# Altium PCB PCB_NewSim_2_2023-07-09.pcbdoc (part 3 of 3)
Units mil, origin at the board's own origin, x right, y up, seen from the top; angles counter-clockwise.
Board outline 6950 x 7613.07 mil, 2 copper layers (Top Layer, Bottom Layer); 120 components, 161 nets, 571 pads, 250 vias.
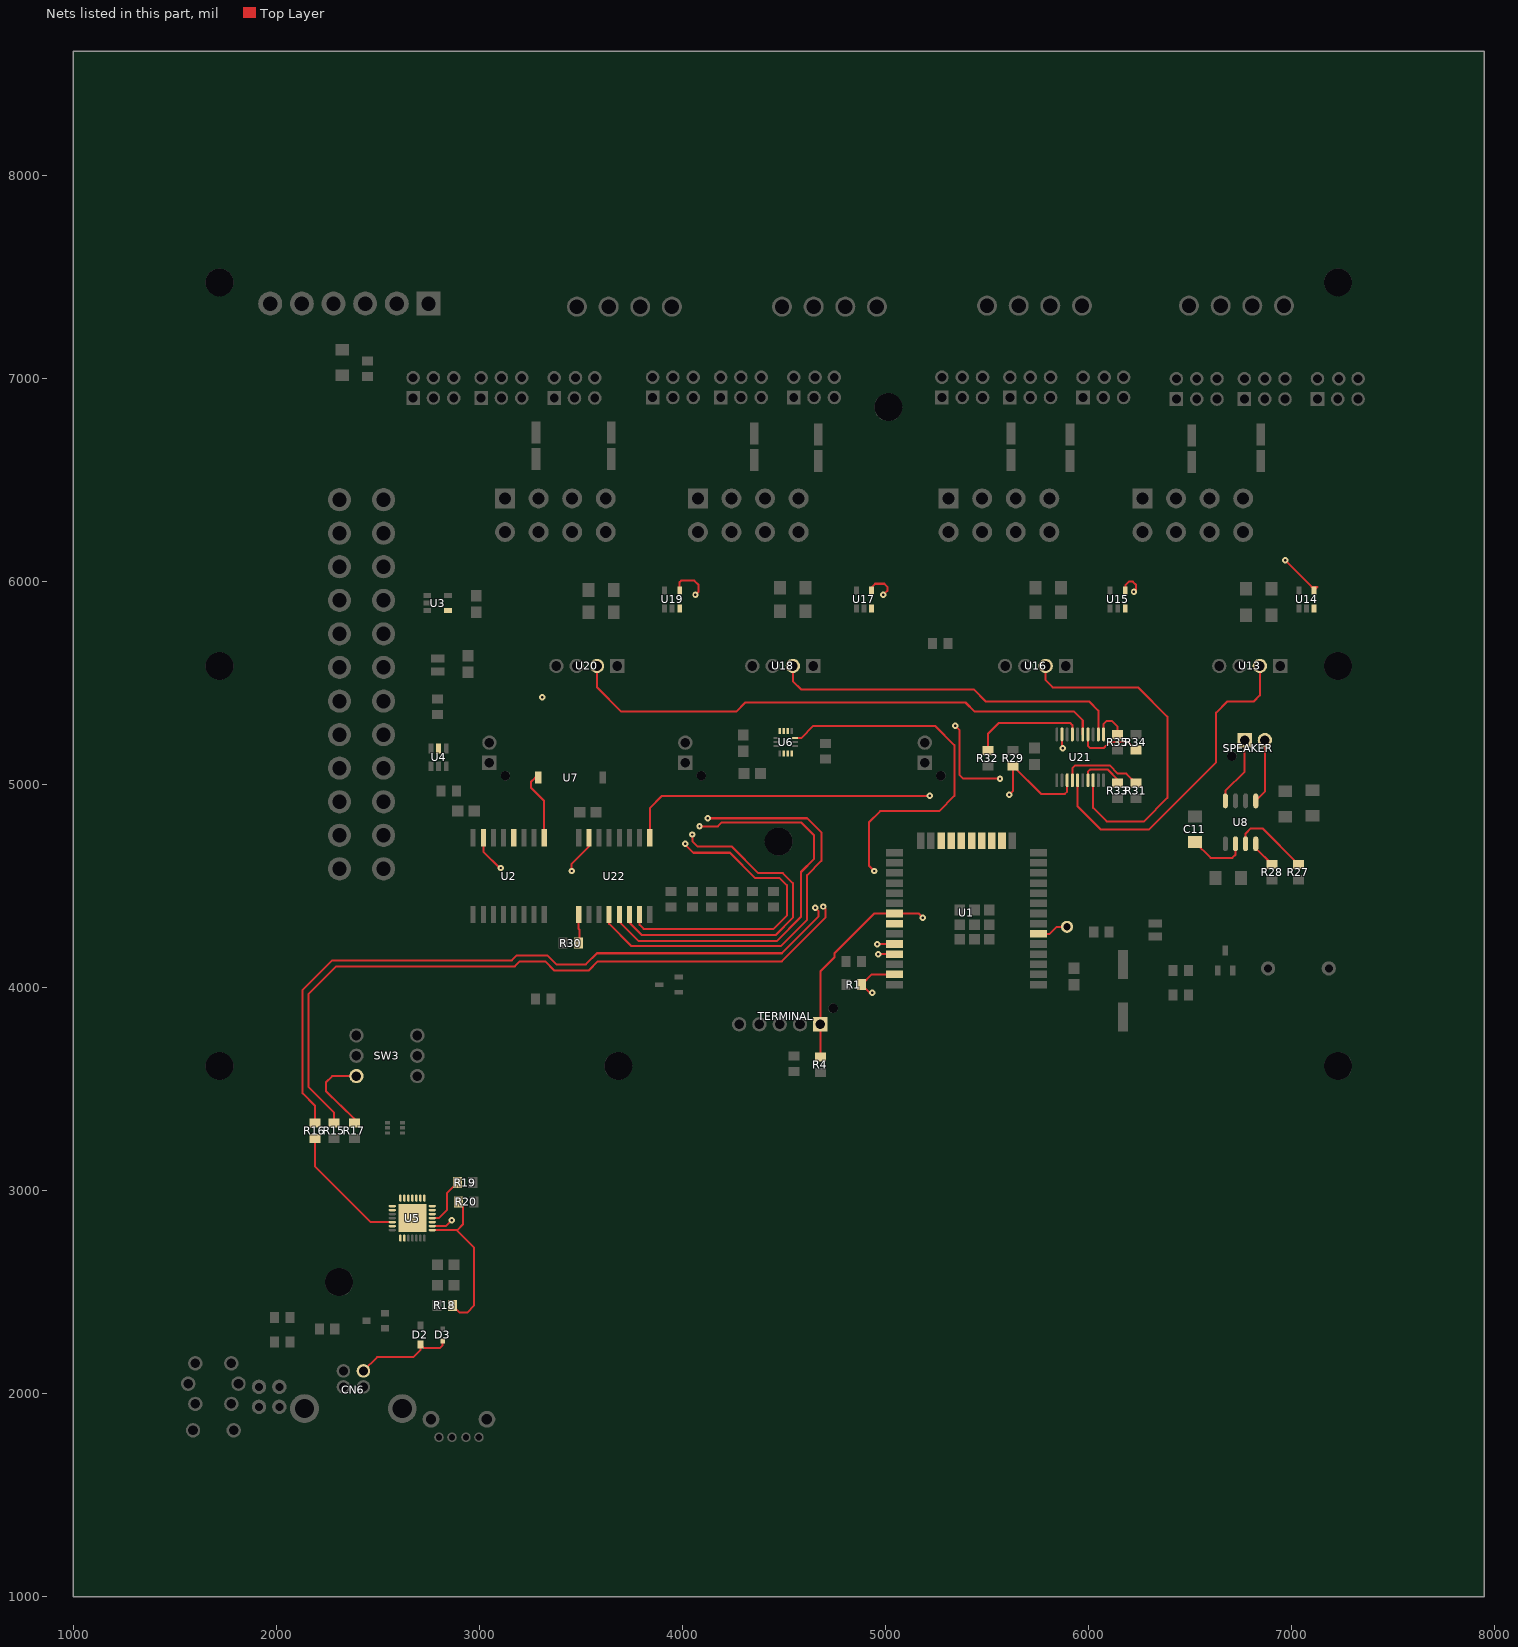
[diagram p3: the nets of this part, all layers, seen from the top]

## Via types
v1: diameter 31.5, hole 12, Top Layer to Bottom Layer, tented both sides, 239 vias
v2: diameter 39.37, hole 19.69, Top Layer to Bottom Layer, tented both sides, 10 vias
v3: diameter 24, hole 12, Top Layer to Bottom Layer, tented both sides, 1 vias

## Nets (pads, with @x,y where several pads share a name; then routed paths per layer and width w, separated by ;. In a path a pad name is that pad's centre, name@x,y a point inside that pad or via, vN(x,y) a via of type N, cw(c..) or ccw(c..) an arc to the next point about the centre after c; other vN are vias at no path point) (continued)
SDA_6DOF: R4.2 TERMINAL.1 U1.31 U6.14 | length 3536.2
  Top Layer w10: U6.14@4555.18,5229.61 4585.4,5229.62 4645.7,5289.93 4833,5289.93 5245,5289.93 5340,5194.93 5340,4944.93 5265,4869.93 4975,4869.93 4920,4814.93 4920,4599.93 v1(4945,4574.93) ; R4.2@4680,3662.97 TERMINAL.1@4680,3819.93 4680,4079.93 4750,4149.93 4750,4169.93 4945.6,4365.52 U1.31@5045.67,4365.49 5164.4,4365.52 v1(5185,4344.93)
  Mid-Layer 2 w10: v1(4945,4574.93) 4945,4599.93 4925,4619.93 4870,4619.93 4830,4579.93 4830,4519.93 5000,4349.93 5180,4349.93 v1(5185,4344.93)
SDA_ENC_RESET: R1.1 U1.37 U2.15 U21.19 U22.15 | length 6586.7
  Top Layer w10: U2.15@3020,4738.9 3020,4669.93 3100,4589.93 v1(3105,4589.93) ; v1(3455,4574.93) 3455,4609.93 3540,4694.93 U22.15@3540,4738.9 ; v1(4935,3974.93) 4923.04,3974.93 R1.1@4883.04,4014.93 4933.61,4065.49 U1.37@5045.67,4065.49 ; U21.19@5870.43,5247.96 5870.43,5184.49 v1(5875,5179.93)
  Mid-Layer 1 w10: v1(3310,5429.93) 3310,5259.93 3220,5169.93 3220,5024.93 3175,4979.93 3100,4979.93 3020,4899.93 3020,4674.93 v1(3105,4589.93) 3105,4594.93 3135,4624.93 3405,4624.93 v1(3455,4574.93) 4300,4574.93 4900,3974.93 v1(4935,3974.93)
  Mid-Layer 2 w10: v1(3310,5429.93) 3375,5494.93 5210,5494.93 5525,5179.93 v1(5875,5179.93)
SDA_PR_A: U16.2 U21.8 | length 1721.5
  Top Layer w10: U16.2@5790,5584.93 5790,5514.93 5825,5479.93 6245,5479.93 6390,5334.93 6390,4934.93 6275,4819.93 6090,4819.93 6024,4885.93 U21.8@6023.98,5021.89
SDA_PR_B: U18.2 U21.12 | length 1756.9
  Top Layer w10: U18.2@4545,5584.93 4545,5509.93 4585,5469.93 5435,5469.93 5495,5409.93 6005,5409.93 6049.6,5365.32 U21.12@6049.6,5247.93
SDA_PR_C: U20.2 U21.15 | length 2671.7
  Top Layer w10: U20.2@3580,5584.93 3580,5479.93 3700,5359.93 4265,5359.93 4310,5404.93 5395,5404.93 5440,5359.93 5930,5359.93 5972.8,5317.12 U21.15@5972.8,5247.93
SDA_YAW: U13.2 U21.5 | length 1635.6
  Top Layer w10: U21.5@5947.2,5021.89 5947.2,4892.73 6060,4779.93 6300,4779.93 6630,5109.93 6630,5354.93 6685,5409.93 6815,5409.93 6845,5439.93 U13.2@6845,5584.93
TXD: R16.2 U5.26 | length 632.3
  Top Layer w10: R16.2@2190,3256.88 2190,3119.93 2464.71,2845.22 U5.26@2571.57,2845.22
U0RXD: R16.1 U1.34 | length 3965.4
  Top Layer w10: R16.1@2190,3332.93 2190,3419.93 2130,3479.93 2130,3989.93 2275,4134.93 3160,4134.93 3185,4159.93 3335,4159.93 3380,4114.93 3525,4114.93 3580,4169.93 4490,4169.93 4670,4349.93 4670,4378.73 v1(4655.3,4393.43) ; v1(4960,4214.93) U1.34@5045.67,4215.49
  Mid-Layer 1 w10: v1(4655.3,4393.43) 4655.3,4319.62 4665,4309.93 4865,4309.93 v1(4960,4214.93)
U0TXD: R15.1 U1.35 | length 4052.1
  Top Layer w10: R15.1@2285,3332.93 2285,3384.93 2160,3509.93 2160,3969.93 2295,4104.93 2455,4104.93 3175,4104.93 3200,4129.93 3325,4129.93 3370,4084.93 3538.4,4084.93 3583.4,4129.93 4490,4129.93 4705,4344.93 4705,4389.93 v1(4695,4399.93) ; v1(4965,4164.93) U1.35@5045.67,4165.49
  Mid-Layer 1 w10: v1(4695,4399.93) 4695,4359.93 4720,4334.93 4915,4334.93 4995,4254.93 4995,4194.93 v1(4965,4164.93)
U1_6: pad.1 U1.6 | length 155.2
  Top Layer w10: U1.6@5754.33,4265.5 5810,4264.93 5845,4299.93 v1(5895,4299.93)
U1_16: U1.16
U1_17: U1.17
U1_18: U1.18
U1_19: U1.19
U1_20: U1.20
U1_21: U1.21
U1_22: U1.22
U1_32: U1.32
U2_12: U2.12
U3_4: U3.4
U4_5: U4.5
U5_1: U5.1
U5_2: U5.2
U5_8: R18.2 R20.2 U5.8 | length 946.3
  Top Layer w10: U5.8@2768.42,2805.82 2889.1,2805.82 2975,2719.93 2975,2434.93 2940,2399.93 2903,2399.93 R18.2@2868.04,2434.93 ; U5.8@2768.4,2805.93 2891,2805.93 2920,2834.93 2920,2921.93 R20.2@2896.96,2944.93
U5_10: U5.10
U5_11: R19.2 U5.11 | length 244.7
  Top Layer w10: U5.11@2768.42,2864.92 2800,2864.93 2840,2904.93 2840,2987.93 R19.2@2891.96,3039.93
U5_12: U5.12
U5_13: U5.13
U5_14: U5.14
U5_15: U5.15
U5_16: U5.16
U5_17: U5.17
U5_18: U5.18
U5_19: U5.19
U5_20: U5.20
U5_21: U5.21
U5_22: U5.22
U5_23: U5.23
U5_27: U5.27
U5_29: U5.29
U6_2: U6.2
U6_3: U6.3
U6_4: U6.4
U6_9: U6.9
U6_10: U6.10
U6_11: U6.11
U8_2: C11.1 U8.2 | length 292.6
  Top Layer w10: C11.1@6525,4717.23 6602.3,4639.93 6710,4639.93 6725,4654.93 U8.2@6725,4709.31
U8_3: R27.2 U8.3 | length 394.3
  Top Layer w10: U8.3@6775,4709.31 6775,4759.93 6800,4784.93 6858.04,4784.93 R27.2@7035,4607.97
U8_4: R28.2 U8.4 | length 134.5
  Top Layer w10: U8.4@6825,4709.31 6825,4687.97 R28.2@6905,4607.97
U8_5: SPEAKER.2 U8.5 | length 318
  Top Layer w10: U8.5@6825,4920.53 6870,4965.53 SPEAKER.2@6870,5219.93
U8_8: SPEAKER.1 U8.8 | length 338.8
  Top Layer w10: U8.8@6675,4920.53 6675,4969.93 6770,5064.93 SPEAKER.1@6770,5219.93
U14_3: U14.3
U14_4: U14.4 U22.4 | length 6327.5
  Top Layer w10: U22.4@3640,4360.95 3640,4314.93 3750,4204.93 4485,4204.93 4615,4334.93 4615,4554.93 4685,4624.93 4685,4764.93 4615,4834.93 v1(4125,4834.93) ; v1(6970,6104.93) 7100,5974.93 7130,5974.93 7112.4,5957.32 U14.4@7112.4,5955.73
  Mid-Layer 1 w10: v1(4125,4834.93) 4230,4939.93 5145,4939.93 5195,4989.93 6275,4989.93 6330,5044.93 6330,5719.93 6395,5784.93 6905,5784.93 6940,5819.93 6940,6079.82 6964.7,6104.93 v1(6970,6104.93)
U15_3: U15.3
U15_4: U15.4 U22.5 | length 5797.3
  Top Layer w10: U22.5@3690,4360.95 3690,4324.93 3785,4229.93 4465,4229.93 4585,4349.93 4585,4569.93 4650,4634.93 4650,4749.93 4585,4814.93 4195,4814.93 4175,4794.93 v1(4085,4794.93) ; v1(5345,5289.93) 5365,5269.93 5365,5049.93 5385,5029.93 v1(5565,5029.93) ; U15.4@6182.4,5955.73 6182.4,5982.32 6200,5999.93 6220,5999.93 6235,5984.93 6235,5959.93 v1(6225,5949.93)
  Mid-Layer 1 w10: v1(4085,4794.93) 4075,4804.93 4075,4874.93 4185,4984.93 5025,4984.93 5105,5064.93 5105,5239.93 5155,5289.93 v1(5345,5289.93) ; v1(5565,5029.93) 6145,5029.93 6225,5109.93 v1(6225,5949.93)
U17_3: U17.3
U17_4: U17.4 U22.6 | length 3836.8
  Top Layer w10: U22.6@3740,4360.95 3740,4319.93 3800,4259.93 4460,4259.93 4545,4344.93 4545,4514.93 4495,4564.93 4375,4564.93 4245,4694.93 4077.2,4694.93 4050,4722.13 v1(4050,4754.93) ; U17.4@4932.4,5955.73 4932.4,5972.32 4950,5989.93 4995,5989.93 5010,5974.93 5010,5954.93 v1(4990,5934.93)
  Mid-Layer 1 w10: v1(4050,4754.93) 4050,4894.93 4185,5029.93 4905,5029.93 4990,5114.93 v1(4990,5934.93)
U19_3: U19.3
U19_4: U19.4 U22.7 | length 3087.7
  Top Layer w10: U22.7@3790,4360.95 3790,4309.93 3810,4289.93 4450,4289.93 4515,4354.93 4515,4504.93 4480,4539.93 4360,4539.93 4235,4664.93 4055,4664.93 4015,4704.93 v1(4015,4709.93) ; U19.4@3987.4,5955.73 3987.4,5997.32 3995,6004.93 4060,6004.93 4080,5984.93 4080,5949.93 v1(4065,5934.93)
  Mid-Layer 1 w10: v1(4015,4709.93) 4015,4904.93 4175,5064.93 4175,5729.93 4065,5839.93 v1(4065,5934.93)
U21_3: R29.1 U21.3 U22.9 | length 2476.5
  Top Layer w10: U22.9@3840,4738.9 3840,4884.93 3900,4944.93 v1(5220,4944.93) ; v1(5610,4949.93) 5630,4969.93 R29.1@5630,5091.88 5766.96,4954.93 5885,4954.93 5896.02,4965.95 U21.3@5896.02,5021.89
  Mid-Layer 1 w10: v1(5220,4944.93) 5225,4949.93 v1(5610,4949.93)
U21_4: R31.2 U21.4 | length 414.6
  Top Layer w10: U21.4@5921.61,5021.89 5921.6,5081.52 5935,5094.93 6105,5094.93 6145,5054.93 6188.04,5054.93 R31.2@6235,5007.97
U21_7: R33.2 U21.7 | length 230.5
  Top Layer w10: U21.7@5998.39,5021.89 5998.4,5063.33 6010,5074.93 6095,5074.93 6145,5024.93 R33.2@6145,5007.97
U21_11: R35.1 U21.11 | length 177.5
  Top Layer w10: U21.11@6075.16,5247.96 6075.16,5300.09 6090,5314.93 6115,5314.93 6145,5284.93 R35.1@6145,5247.97
U21_14: R34.1 U21.14 | length 326
  Top Layer w10: U21.14@5998.39,5247.96 5998.39,5191.53 6010,5179.93 6075,5179.93 6105,5209.93 6196.96,5209.93 R34.1@6235,5171.88
U21_17: R32.1 U21.17 | length 571.5
  Top Layer w10: R32.1@5505,5167.97 5505,5249.93 5560,5304.93 5910,5304.93 5921.61,5293.32 U21.17@5921.61,5247.96
U22_1: R30.1 U22.1 | length 142.3
  Top Layer w10: U22.1@3490,4360.95 3490,4289.93 3493.04,4286.89 R30.1@3493.04,4219.93
USB_AUTORESET: R17.2 SW3.6 U5.9 | length 1458.8
  Top Layer w10: R17.2@2385,3332.93 2385,3354.93 2245,3489.93 2245,3534.93 2275,3564.93 SW3.6@2395,3564.93 ; U5.9@2768.42,2825.52 2835.59,2825.51 v1(2865,2854.93)
  Mid-Layer 1 w10: SW3.6@2395,3564.93 2435,3564.93 2480,3519.93 2485,3254.93 2865,2874.93 v1(2865,2854.93)
VBUS: CN6.1 D2.2 D3.2 | length 496.5
  Top Layer w10: CN6.1@2429.21,2112.64 2496.5,2179.93 2675,2179.93 2710,2214.93 D2.2@2710,2243.76 2728.84,2224.93 2805,2224.93 2820,2239.93 D3.2@2820,2260.4
VIBRATION: U2.9 U7.1 | length 347.8
  Top Layer w10: U7.1@3291.54,5034.93 3275,5034.93 3255,5014.93 3255,4984.93 3320,4919.93 U2.9@3320,4738.9
pads on no net: CN3. CN4. CN5. SPEAKER. TERMINAL.

## Polygon pours and split planes (outlines as drawn)
GND on Bottom Layer (solid): 1535,1789.92 2135,1789.92 2235,1689.92 2980,1689.92 3080,1789.92 3080,3639.93 3260,3819.93 3940,3819.93 4285,3474.93 4820,3474.93 5005,3659.93 5005,3979.93 5040,4014.93 5750,4014.93 5760,4014.93 6030,3744.93 6880,3744.93 6995,3859.93 7115,3979.93 7115,4334.93 7235,4454.93 7235,5339.93 7115,5459.93 7115,5764.93 7235,5884.93 7235,6009.93 7095,6149.93 3045,6149.93 2900,6294.93 2900,6409.93 2650,6659.93 2565,6659.93 2490,6734.93 2490,7034.93 2615,7159.93 2735,7159.93 2900,7324.93 2900,7519.93 2810,7609.93 1990,7609.93 1890,7509.93 1890,4274.93 1800,4184.93 1800,2554.93 1535,2289.93
GND1 on Bottom Layer (solid): 7070,6184.93 7070,6499.93 7400,6829.93 7400,7044.93 7280,7164.93 7220,7164.93 7125,7259.93 7125,7544.93 7005,7664.93 5130,7664.93 3280,7649.93 2820,7169.93 2800,7169.93 2745,7114.93 2670,7114.93 2560,7004.93 2560,6819.93 2695,6684.93 2700,6684.93 3015,6369.93 3015,6254.93 3085,6184.93
GND1 on Bottom Layer (solid): 3120,6199.93 6890,6199.93 6905,6214.93 6905,6104.93 3125,6104.93 3115,6094.93
GND on Mid-Layer 2 (solid): 1535,1784.92 2135,1784.92 2235,1684.92 2980,1684.92 3080,1784.92 3080,3634.93 3260,3814.93 3940,3814.93 4285,3469.93 4820,3469.93 5005,3654.93 5005,3974.93 5040,4009.93 5750,4009.93 5760,4009.93 5925,3844.93 6995,3844.93 6995,3854.93 7115,3974.93 7115,4329.93 7235,4449.93 7235,5334.93 7115,5454.93 7115,5759.93 7235,5879.93 7235,6004.93 7030,6314.93 2990,6314.93 2900,6404.93 2650,6654.93 2565,6654.93 2490,6729.93 2490,7029.93 2615,7154.93 2735,7154.93 2900,7319.93 2900,7514.93 2810,7604.93 1990,7604.93 1890,7504.93 1890,4624.93 1800,4559.93 1800,4179.93 1800,2549.93 1535,2284.93
GND on Top Layer (solid): 1535,1789.92 2135,1789.92 2235,1689.92 2980,1689.92 3080,1789.92 3080,3639.93 3260,3819.93 3940,3819.93 4285,3474.93 4820,3474.93 5005,3659.93 5005,3979.93 5040,4014.93 5750,4014.93 5760,4014.93 6030,3734.93 6880,3734.93 6995,3849.93 6995,3859.93 7115,3979.93 7115,4334.93 7235,4454.93 7235,5339.93 7115,5459.93 7115,5764.93 7235,5884.93 7235,6009.93 7115,6069.93 7095,6149.93 3045,6149.93 2900,6294.93 2900,6409.93 2650,6659.93 2565,6659.93 2490,6734.93 2490,7034.93 2615,7159.93 2735,7159.93 2900,7324.93 2900,7519.93 2810,7609.93 1990,7609.93 1890,7509.93 1890,4274.93 1800,4184.93 1800,2554.93 1535,2289.93
GND1 on Top Layer (solid): 7070,6179.93 7070,6494.93 7400,6824.93 7400,7039.93 7280,7159.93 7220,7159.93 7125,7254.93 7125,7539.93 7005,7659.93 5130,7659.93 3235,7644.93 3210,7644.93 3210,7604.93 3235,7604.93 2820,7164.93 2800,7164.93 2745,7109.93 2670,7109.93 2560,6999.93 2560,6814.93 2695,6679.93 2700,6679.93 3015,6364.93 3015,6249.93 3085,6179.93

## Other copper
Top Layer:
  drawing of 519 lines, arcs and shapes, not listed
Mid-Layer 1:
  region net OUT-A_YAW: 6786.69,6971.48 6786.69,7028.37 6816.8,7033.39 6816.8,6966.46
  region net OUT-A_YAW: 6786.69,6971.48 6786.69,7028.37 6816.8,7033.39 6816.8,6966.46
  region net OUT-A_YAW: 6797.5,6982.3 6740.61,6982.3 6735.59,6952.18 6802.52,6952.18
  region net OUT-A_YAW: 6851.43,6971.48 6851.43,7028.37 6821.31,7033.39 6821.31,6966.46
  region net OUT-A_YAW: 6851.43,6971.48 6851.43,7028.37 6821.31,7033.39 6821.31,6966.46
  region net +12V_VCC: 7100.97,7018.11 7157.84,7016.99 7135,7047.56 7125,7047.76
  region net MOTOR_ENABLE: 7357.68,6882.58 7300.79,6882.02 7324.53,6852.13 7334.53,6852.23
  region net +12V_VCC: 5948.03,7028.46 6004.48,7021.38 5985,7054.17 5975,7055.43
  region net +12V_VCC: 6002.5,7025.05 5945.61,7025.05 5969.06,7055.17 5979.06,7055.17
  region net MOTOR_ENABLE: 6206.63,6915.09 6166.43,6874.84 6204.31,6870.15 6211.37,6877.22
  region net MOTOR_ENABLE: 6202.52,6889.82 6145.63,6889.77 6170.16,6859.67 6178.04,6859.68
  region net +12V_VCC: 4571.84,7031.94 4516.97,7016.91 4530.9,7051.96 4542,7055
  region net +12V_VCC: 4577.5,7025.05 4520.61,7025.05 4544.06,7048.99 4554.06,7048.99
  region net MOTOR_ENABLE: 4777.52,6889.82 4720.63,6889.77 4745.16,6859.67 4753.04,6859.68
  region net MOTOR_ENABLE: 4763.04,6937.83 4715.61,6906.42 4719.34,6945.01 4726.04,6949.45
  region net +12V_VCC: 3401.9,6998.49 3360.21,7037.2 3397.88,7043.32 3405.21,7036.51
  region net +12V_VCC: 3359.23,6972.94 3344.78,7027.96 3321.41,6998.4 3324.35,6987.2
  region net C_PR_PWM_B: 3497.52,6887.32 3440.63,6887.27 3464.1,6857.17 3474.1,6857.18
  region net MOTOR_ENABLE: 3595.9,6884.94 3539.22,6889.78 3561.06,6857.69 3568.94,6857.02
  region net PAIRBTN: 2825.06,1788.2 2788.83,1805.52 2811.34,1818.33 2820.9,1813.76
  region net GPIO0: 3006.61,1807.79 2974.94,1783.1 2973.73,1809.12 2981.68,1815.31
  region net GPIO0: 2376.33,3634.81 2376.33,3695.04 2344.44,3669.93 2344.44,3659.93
  region net USB_AUTORESET: 2413.67,3534.81 2413.67,3595.04 2435,3569.93 2435,3559.93
  region net ESP_EN: 2713.67,3534.81 2713.67,3595.04 2745.56,3569.93 2745.56,3559.93
  region net ESP_EN: 2676.33,3534.81 2676.33,3595.04 2644.44,3569.93 2644.44,3559.93
  region net LED_A: 1989.17,2058.39 2048.22,2046.47 2030,2082.68 2020,2084.7
  region net LED_B: 1983.15,1920.2 2015.28,1971.15 1974.97,1967.02 1969.5,1958.35
  region net +12V_VCC: 7214.72,4113.6 7154.49,4113.58 7179.6,4145.48 7189.6,4145.48
  region net U21_3: 5601.7,4936.54 5601.7,4963.31 5587.53,4954.93 5587.53,4944.93
  region net U21_3: 5231.07,4933.72 5225.11,4959.82 5240.76,4954.93 5243.05,4944.93
  region net SCL_ENC_RESET: 3089.67,4656.33 3108.6,4675.26 3092.65,4679.35 3085.58,4672.28
  region net SCL_ENC_RESET: 3113.3,4646.54 3113.3,4673.31 3127.47,4664.93 3127.47,4654.93
  region net SCL_ENC_RESET: 3571.4,4644.59 3590.33,4663.52 3594.42,4647.57 3587.35,4640.5
  region net SCL_ENC_RESET: 3566.7,4646.54 3566.7,4673.31 3552.53,4664.93 3552.53,4654.93
  region net INT_IO: 5141.2,4625.99 5115.1,4620.03 5120,4635.69 5130,4637.97
  region net INT_IO: 3141.4,4834.59 3160.33,4853.52 3164.42,4837.57 3157.35,4830.5
  region net GPIO0: 4976.7,4651.54 4976.7,4678.31 4962.53,4669.93 4962.53,4659.93
  region net GPIO0: 4763.3,4651.54 4763.3,4678.31 4777.47,4669.93 4777.47,4659.93
  region net GPIO2: 4833.3,4781.54 4833.3,4808.31 4847.47,4799.93 4847.47,4789.93
  region net GPIO2: 4991.7,4781.54 4991.7,4808.31 4977.53,4799.93 4977.53,4789.93
  region net ESP_EN: 6021.43,4163.22 5994.66,4163.22 6003.04,4177.39 6013.04,4177.39
  region net INT_ENC_EN: 3901.7,4886.54 3901.7,4913.31 3887.53,4904.93 3887.53,4894.93
  region net INT_ENC_EN: 3663.3,4886.54 3663.3,4913.31 3677.47,4904.93 3677.47,4894.93
  region net INT_IO: 4328.3,4851.54 4328.3,4878.31 4342.47,4869.93 4342.47,4859.93
  region net INT_IO: 3894.29,4856.07 3915.97,4840.35 3900.91,4833.76 3892.71,4839.71
  region net AUDIO_MODE: 3288.3,4811.54 3288.3,4838.31 3302.47,4829.93 3302.47,4819.93
  region net PAIRBTN: 2363.39,2331.63 2336.61,2331.63 2345,2317.46 2355,2317.46
  region net POWER_L2: 2709.67,4996.33 2728.6,5015.26 2712.65,5019.35 2705.58,5012.28
  region net POWER_L2: 2733.59,5439.24 2721.58,5463.17 2712.56,5449.55 2717.28,5440.14
  region net POWER_3: 2748.42,5051.68 2736.41,5075.61 2752.72,5074.71 2757.44,5065.3
  region net POWER_3: 2712.61,5814.59 2731.54,5833.52 2735.63,5817.57 2728.56,5810.5
  region net ESP_EN: 2761.4,5989.59 2780.33,6008.52 2784.42,5992.57 2777.35,5985.5
  region net SDA_ENC_RESET: 3089.67,4586.33 3108.6,4605.26 3092.65,4609.35 3085.58,4602.28
  region net SDA_ENC_RESET: 3099.03,4604.5 3120.71,4588.78 3122.29,4605.14 3114.09,4611.09
  region net SDA_ENC_RESET: 3463.3,4561.54 3463.3,4588.31 3477.47,4579.93 3477.47,4569.93
  region net SDA_ENC_RESET: 3439.67,4571.33 3458.6,4590.26 3442.65,4594.35 3435.58,4587.28
  region net SDA_ENC_RESET: 4926.7,3961.54 4926.7,3988.31 4912.53,3979.93 4912.53,3969.93
  region net ESP_EN: 4051.7,3841.54 4051.7,3868.31 4037.53,3859.93 4037.53,3849.93
  region net ESP_EN: 4811.4,4395.26 4830.33,4376.33 4834.42,4392.28 4827.35,4399.35
  region net U0TXD: 4708.39,4391.63 4681.61,4391.63 4690,4377.46 4700,4377.46
  region net U0RXD: 4668.68,4385.13 4641.91,4385.13 4650.3,4370.96 4660.3,4370.96
  region net U0TXD: 4961.4,4180.26 4980.33,4161.33 4984.42,4177.28 4977.35,4184.35
  region net U0RXD: 4944.67,4211.33 4963.6,4230.26 4947.65,4234.35 4940.58,4227.28
  region net SCL_ENC_RESET: 4859.67,4191.33 4878.6,4210.26 4862.65,4214.35 4855.58,4207.28
  region net AUDIO_MODE: 5804.67,4826.33 5823.6,4845.26 5807.65,4849.35 5800.58,4842.28
  region net U14_4: 4121.4,4850.26 4140.33,4831.33 4144.42,4847.28 4137.35,4854.35
  region net U15_4: 4093.29,4808.31 4069.32,4796.4 4070,4812.56 4080,4817.53
  region net U17_4: 4063.39,4763.22 4036.61,4763.22 4045,4777.39 4055,4777.39
  region net U19_4: 4028.39,4718.22 4001.61,4718.22 4010,4732.39 4020,4732.39
  region net U14_4: 6971.1,6089.22 6955.44,6110.93 6948.81,6095.9 6954.74,6087.67
  region net U15_4: 5336.7,5276.54 5336.7,5303.31 5322.53,5294.93 5322.53,5284.93
  region net U15_4: 5573.3,5016.54 5573.3,5043.31 5587.47,5034.93 5587.47,5024.93
  region net U15_4: 6238.39,5941.63 6211.61,5941.63 6220,5927.46 6230,5927.46
  region net U17_4: 5003.39,5926.63 4976.61,5926.63 4985,5912.46 4995,5912.46
  region net U19_4: 4078.39,5926.63 4051.61,5926.63 4060,5912.46 4070,5912.46
  region net AUX: 5929.67,4231.33 5948.6,4250.26 5933.54,4253.46 5926.46,4246.39
  region net B_PR_PWM_A: 5115.5,4245.76 5139.16,4269.42 5143.4,4248.6 5136.32,4241.53
  region net C_PR_PWM_B: 5649.67,4318.52 5668.6,4299.59 5653.54,4296.39 5646.46,4303.46
  region net C_PR_PWM_A: 5676.07,4363.72 5670.11,4389.82 5685.76,4384.93 5688.05,4374.93
  region net LED_A: 2051.14,2499.22 2035.43,2520.89 2028.84,2505.83 2034.78,2497.64
  region net LED_B: 2054.67,2718.52 2073.6,2699.59 2057.65,2695.5 2050.58,2702.57
  region net USB_AUTORESET: 2878.39,2863.22 2851.61,2863.22 2860,2874.93 2870,2874.93
  region net DTR: 2483.3,3001.54 2483.3,3028.31 2497.47,3019.93 2497.47,3009.93
  region net DTR: 2471.4,2805.26 2490.33,2786.33 2494.42,2802.28 2487.35,2809.35
  region net SCL_ENC_RESET: 3408.39,5381.63 3381.61,5381.63 3390,5367.46 3400,5367.46
  region net SDA_ENC_RESET: 3323.39,5421.63 3296.61,5421.63 3305,5407.46 3315,5407.46
  region net OUT-A_YAW: 6735.6,6933.38 6802.51,6933.38 6802.52,6999.93 6735.59,6999.93
  region net B_PR_PWM_A: 4561.56,6873.97 4536.56,6873.97 4544.06,6858.97 4554.06,6858.97
  region net C_PR_PWM_A: 3381.6,6871.47 3356.6,6871.47 3364.1,6856.47 3374.1,6856.47
Mid-Layer 2:
  region net OUT-A_YAW: 6797.5,6982.3 6740.61,6982.3 6735.59,6952.18 6802.52,6952.18
  region net OUT-A_YAW: 6797.5,7017.55 6740.61,7017.55 6735.59,7047.67 6802.52,7047.67
  region net OUT-A_YAW: 6786.69,6971.48 6786.69,7028.37 6816.8,7033.39 6816.8,6966.46
  region net OUT-A_YAW: 6786.69,6971.48 6786.69,7028.37 6816.8,7033.39 6816.8,6966.46
  region net OUT-A_YAW: 6797.5,6982.3 6740.61,6982.3 6735.59,6952.18 6802.52,6952.18
  region net OUT-B_YAW: 6886.69,6871.48 6886.69,6928.37 6916.8,6933.39 6916.8,6866.46
  region net OUT-B_YAW: 6886.69,6871.48 6886.69,6928.37 6916.8,6933.39 6916.8,6866.46
  region net OUT-A_YAW: 6838.79,6985.66 6869.76,7033.38 6847.63,7054.62 6810.38,6997.22
  region net OUT-A_YAW: 6851.43,6971.48 6851.43,7028.37 6821.31,7033.39 6821.31,6966.46
  region net OUT-A_YAW: 6851.43,6971.48 6851.43,7028.37 6821.31,7033.39 6821.31,6966.46
  region net OUT-B_YAW: 6997.5,6917.55 6940.61,6917.55 6921.73,6935.27 7016.38,6935.27
  region net OUT-B_YAW: 6951.43,6871.48 6951.43,6928.37 6933.71,6947.25 6933.71,6852.6
  region net OUT-B_YAW: 6997.5,6917.55 6940.61,6917.55 6935.59,6947.67 7002.52,6947.67
  region net OUT-B_YAW: 6951.43,6871.48 6951.43,6928.37 6921.31,6933.39 6921.31,6866.46
  region net OUT-B_YAW: 6997.5,7017.55 6940.61,7017.55 6935.59,7035.86 7002.52,7035.86
  region net OUT-B_YAW: 6997.5,6982.3 6940.61,6982.3 6935.59,6952.18 7002.52,6952.18
  region net PWM-B_YAW: 7200.97,6881.74 7257.84,6882.86 7235,6852.29 7225,6852.09
  region net A_PR_PWM_B: 6102.52,6889.82 6045.63,6889.77 6069.1,6859.67 6079.1,6859.68
  region net B_PR_PWM_B: 4677.5,6889.8 4620.61,6889.8 4644.06,6859.68 4654.06,6859.68
  region net MOTOR_ENABLE: 4768.21,6934.87 4765.11,6878.06 4794.73,6899.93 4795.27,6909.93
  region net OUT-A_YAW: 6455.77,7331.72 6539.31,7336.36 6533.46,7291.68 6466.54,7287.96
  region net OUT-B_YAW: 6611.38,7332.29 6694.97,7335.75 6688.46,7291.15 6621.54,7288.39
  region net +3.3V: 4410.12,3838.59 4349.88,3838.59 4372.13,3870.48 4387.87,3870.48
  region net +5V: 4310.12,3838.59 4249.88,3838.59 4275,3870.48 4285,3870.48
  region net +3.3V: 3448.3,4881.54 3448.3,4908.31 3462.47,4902.8 3462.47,4887.05
  region net +3.3V: 3450.41,4883.11 3424.79,4890.86 3424.94,4876.01 3442.04,4870.83
  region net +3.3V: 3136.7,4891.54 3136.7,4918.31 3122.53,4912.8 3122.53,4897.05
  region net +3.3V: 3141.4,4889.59 3160.33,4908.52 3166.46,4894.6 3155.32,4883.47
  region net POWER_OK: 2799.67,4801.33 2818.6,4820.26 2802.65,4824.35 2795.58,4817.28
  region net +3.3V: 2836.4,4755.26 2855.33,4736.33 2861.46,4750.25 2850.32,4761.38
  region net +5V: 7014.67,4731.33 7033.6,4750.26 7017.65,4754.35 7010.58,4747.28
  region net +3.3V: 6443.62,5077.02 6416.86,5076.25 6425.65,5062.32 6435.65,5062.61
  region net +3.3V: 6443.39,5093.22 6416.61,5093.22 6425,5107.39 6435,5107.39
  region net +3.3V: 6286.4,5279.59 6305.33,5298.52 6309.42,5282.57 6302.35,5275.5
  region net +3.3V: 6441.68,5005.52 6435.81,4979.4 6448.23,4982.05 6451.77,4997.8
  region net +3.3V: 6425.1,4979.54 6419.92,5005.8 6407.05,4997.8 6410.16,4982.05
  region net +3.3V: 6444.04,5002.57 6417.26,5002.57 6425.65,5016.74 6435.65,5016.74
  region net +3.3V: 4380.41,5273.11 4354.79,5280.86 4358.06,5265.06 4368.92,5261.78
  region net +3.3V: 4514.67,5056.33 4533.6,5075.26 4517.65,5079.35 4510.58,5072.28
  region net C_PR_PWM_B: 5656.7,4301.54 5656.7,4328.31 5642.53,4319.93 5642.53,4309.93
  region net PWM-B_YAW: 5876.4,4649.59 5895.33,4668.52 5899.42,4652.57 5892.35,4645.5
  region net PWM-A_YAW: 5839.67,4606.33 5858.6,4625.26 5842.65,4629.35 5835.58,4622.28
  region net A_PR_PWM_B: 5546.4,4575.26 5565.33,4556.33 5569.42,4572.28 5562.35,4579.35
  region net A_PR_PWM_A: 6373.3,4551.54 6373.3,4578.31 6387.47,4569.93 6387.47,4559.93
  region net B_PR_PWM_B: 6473.39,4628.22 6461.47,4604.25 6477.64,4604.93 6482.61,4614.93
  region net +3.3V: 2171.4,2275.26 2190.33,2256.33 2196.46,2270.25 2185.32,2281.38
  region net +3.3V: 2900.22,2491.33 2919.15,2510.26 2905.23,2516.38 2894.1,2505.25
  region net +3.3V: 2928.94,2486.63 2902.17,2486.63 2907.68,2472.46 2923.43,2472.46
  region net +3.3V: 2363.39,3151.63 2336.61,3151.63 2342.13,3137.46 2357.87,3137.46
  region net MOTOR_ENABLE: 5174.92,4552.82 5200.32,4561.29 5195.3,4551.69 5184.7,4548.16
  region net SCL_6DOF: 5256.68,4382.18 5242.26,4396.61 5253.57,4400.57 5260.64,4393.5
  region net SDA_6DOF: 5179.89,4359.82 5173.93,4333.72 5161.95,4344.93 5164.24,4354.93
  region net SDA_6DOF: 4958.39,4583.22 4931.61,4583.22 4940,4597.39 4950,4597.39
  region net SCL_6DOF: 4906.76,4526.51 4930.68,4538.52 4929.79,4522.21 4920.37,4517.48
  region net C_PR_PWM_B: 5286.4,4495.26 5305.33,4476.33 5309.42,4492.28 5302.35,4499.35
  region net SCL_ENC_RESET: 5958.24,5166.51 5934.32,5178.52 5935.21,5162.21 5944.63,5157.48
  region net SDA_ENC_RESET: 5866.7,5166.54 5866.7,5193.31 5852.53,5184.93 5852.53,5174.93
  region net SCL_ENC_RESET: 3391.4,5405.26 3410.33,5386.33 3414.42,5402.28 3407.35,5409.35
  region net SDA_ENC_RESET: 3306.4,5445.26 3325.33,5426.33 3329.42,5442.28 3322.35,5449.35
  region net OUT-A_YAW: 6735.6,6933.38 6802.51,6933.38 6802.52,6999.93 6735.59,6999.93
  region net OUT-A_YAW: 6735.6,6933.38 6802.51,6933.38 6802.52,6999.93 6735.59,6999.93
  region net PWM-A_YAW: 7142.5,6866.47 7117.5,6866.47 7125,6851.47 7135,6851.47
  region net A_PR_PWM_A: 5986.56,6873.97 5961.56,6873.97 5969.06,6858.97 5979.06,6858.97
Bottom Layer:
  region net +12V_YAW: 6434.06,6758.98 6267,6591.93 6267,6410.12 6597.71,6410.12 6597.71,6595.34
  region net +12V_PR_A: 5305,6779.93 5305,6595.86 5279.06,6569.93 5279.06,6479.93 5279.06,6443.06 5312,6410.12 5477.35,6410.12 5642.71,6410.12 5642.71,6487.64 5645,6489.93
  region net +12V_PR_B: 4025,6609.93 4025,6462.12 4077,6410.12 4242.35,6410.12 4407.71,6410.12 4407.71,6514.93
  region net +12V_PR_C: 2975,6539.93 3400,6539.93 3457.71,6482.22 3457.71,6410.12 3049.8,6410.12
  region net OUT-A_YAW: 6797.52,7017.53 6740.63,7017.58 6735.64,7047.7 6802.57,7047.64
  region net OUT-A_YAW: 6786.69,6971.48 6786.69,7028.37 6816.8,7033.39 6816.8,6966.46
  region net OUT-A_YAW: 6786.69,6971.48 6786.69,7028.37 6816.8,7033.39 6816.8,6966.46
  region net OUT-A_YAW: 6797.5,6982.3 6740.61,6982.3 6735.59,6952.18 6802.52,6952.18
  region net OUT-B_YAW: 6886.69,6871.48 6886.69,6928.37 6916.8,6933.39 6916.8,6866.46
  region net OUT-A_YAW: 6851.43,6971.48 6851.43,7028.37 6821.31,7033.39 6821.31,6966.46
  region net OUT-A_YAW: 6851.43,6971.48 6851.43,7028.37 6821.31,7033.39 6821.31,6966.46
  region net OUT-B_YAW: 6997.5,6917.55 6940.61,6917.55 6935.59,6947.67 7002.52,6947.67
  region net OUT-B_YAW: 6951.43,6871.48 6951.43,6928.37 6921.31,6933.39 6921.31,6866.46
  region net OUT-B_YAW: 6997.52,7017.53 6940.63,7017.58 6935.64,7045.86 7002.57,7045.79
  region net OUT-B_YAW: 6997.5,6982.3 6940.61,6982.3 6935.59,6952.18 7002.52,6952.18
  region net A_OUT-A_PR: 5631.69,6978.98 5631.69,7035.87 5661.8,7012.43 5661.8,7002.43
  region net A_OUT-A_PR: 5696.43,6978.98 5696.43,7035.87 5666.31,7012.43 5666.31,7002.43
  region net +12V_YAW: 6443.6,6458.04 6384.44,6398.88 6366.34,6428.81 6413.66,6476.14
  region net +12V_YAW: 6406.42,6368.29 6406.42,6451.96 6362.13,6443.59 6362.13,6376.66
  region net +12V_YAW: 6458.27,6368.29 6458.27,6451.96 6502.56,6443.59 6502.56,6376.66
  region net +12V_YAW: 6639.54,6436.05 6555.88,6436.05 6564.25,6480.34 6631.17,6480.34
  region net +12V_YAW: 6571.79,6368.29 6571.79,6451.96 6527.49,6443.59 6527.49,6376.66
  region net +12V_PR_A: 5451.42,6368.29 5451.42,6451.96 5407.13,6443.59 5407.13,6376.66
  region net +12V_PR_A: 5503.27,6368.29 5503.27,6451.96 5547.56,6443.59 5547.56,6376.66
  region net +12V_PR_A: 5601.75,6437.4 5685.36,6434.67 5678.46,6479.21 5611.54,6481.4
  region net +12V_PR_A: 5616.79,6368.29 5616.79,6451.96 5572.49,6443.59 5572.49,6376.66
  region net +12V_PR_B: 4268.27,6368.29 4268.27,6451.96 4312.56,6443.59 4312.56,6376.66
  region net +12V_PR_B: 4216.42,6368.29 4216.42,6451.96 4172.13,6443.59 4172.13,6376.66
  region net +12V_PR_B: 4216.42,6368.29 4216.42,6451.96 4172.13,6443.59 4172.13,6376.66
  region net +12V_PR_B: 4268.27,6368.29 4268.27,6451.96 4312.56,6443.59 4312.56,6376.66
  region net +12V_PR_B: 4449.54,6436.05 4365.88,6436.05 4374.25,6480.34 4441.17,6480.34
  region net +12V_PR_B: 4381.79,6368.29 4381.79,6451.96 4337.49,6443.59 4337.49,6376.66
  region net +12V_PR_B: 4381.79,6368.29 4381.79,6451.96 4337.49,6443.59 4337.49,6376.66
  region net +12V_PR_C: 3318.27,6368.29 3318.27,6451.96 3362.56,6443.59 3362.56,6376.66
  region net +12V_PR_C: 3266.42,6368.29 3266.42,6451.96 3222.13,6443.59 3222.13,6376.66
  region net +12V_PR_C: 3266.42,6368.29 3266.42,6451.96 3222.13,6443.59 3222.13,6376.66
  region net +12V_PR_C: 3318.27,6368.29 3318.27,6451.96 3362.56,6443.59 3362.56,6376.66
  region net +12V_PR_C: 3499.54,6436.05 3415.88,6436.05 3424.25,6480.34 3491.17,6480.34
  region net +12V_PR_C: 3431.79,6368.29 3431.79,6451.96 3387.49,6443.59 3387.49,6376.66
  region net +12V_PR_C: 3431.79,6368.29 3431.79,6451.96 3387.49,6443.59 3387.49,6376.66
  region net A_OUT-A_PR: 5460.77,7331.72 5544.31,7336.36 5538.46,7291.68 5471.54,7287.96
  region net A_OUT-B_PR: 5616.38,7332.29 5699.97,7335.75 5693.46,7291.15 5626.54,7288.39
  region net B_OUT-A_PR: 4504.22,7307.49 4442.78,7364.28 4418.84,7326.1 4468.03,7280.63
  region net B_OUT-B_PR: 4688.14,7327.76 4604.51,7330.26 4611.54,7285.74 4678.46,7283.74
  region net C_OUT-A_PR: 3455.17,7313.09 3455.17,7396.76 3410.88,7388.39 3410.88,7321.46
  region net C_OUT-B_PR: 3676.09,7324.9 3592.86,7333.36 3596.54,7288.47 3663.46,7281.67
  region net OUT-A_YAW: 6537.93,7334 6454.27,7334 6462.63,7289.71 6529.56,7289.71
  region net OUT-B_YAW: 6611.57,7332.01 6695.13,7336.05 6688.46,7301.54 6621.54,7298.31
  region net +12V_YAW: 6400.6,6933.38 6467.51,6933.38 6467.52,6999.93 6400.59,6999.93
  region net +12V_YAW: 6467.51,6866.47 6400.6,6866.47 6400.59,6766.07 6467.52,6766.07
  region net OUT-A_YAW: 6735.6,6933.38 6802.51,6933.38 6802.52,6999.93 6735.59,6999.93
  region net +12V_PR_A: 5245.6,6940.88 5312.51,6940.88 5312.52,7007.43 5245.59,7007.43
  region net +12V_PR_A: 5312.51,6873.97 5245.6,6873.97 5245.59,6805.86 5312.52,6805.86
  region net +12V_PR_A: 5312.51,6873.97 5245.6,6873.97 5245.59,6773.57 5312.52,6773.57
  region net A_OUT-A_PR: 5580.6,6940.88 5647.51,6940.88 5647.52,7007.43 5580.59,7007.43
  region net +12V_PR_B: 3887.51,6873.97 3820.6,6873.97 3820.59,6780.86 3887.52,6780.86
  region net +12V_PR_B: 3820.6,6940.88 3887.51,6940.88 3887.52,7007.43 3820.59,7007.43
  region net B_OUT-A_PR: 4155.6,6940.88 4222.51,6940.88 4222.52,7007.43 4155.59,7007.43
  region net B_OUT-A_PR: 4155.6,6940.88 4222.51,6940.88 4222.52,7007.43 4155.59,7007.43
  region net +12V_PR_C: 2640.6,6938.38 2707.51,6938.38 2707.52,7004.93 2640.59,7004.93
  region net +12V_PR_C: 2707.51,6871.47 2640.6,6871.47 2640.59,6803.99 2707.52,6803.99
  region net C_OUT-A_PR: 2975.6,6938.38 3042.51,6938.38 3042.52,7004.93 2975.59,7004.93
  region net C_OUT-A_PR: 2975.6,6938.38 3042.51,6938.38 3042.52,7004.93 2975.59,7004.93
  region net +12V_YAW: 6217.79,6459.34 6316.21,6459.34 6300.47,6559.73 6233.54,6559.73
  region net +12V_YAW: 6217.79,6459.34 6316.21,6459.34 6300.47,6559.73 6233.54,6559.73
  region net +12V_YAW: 6316.21,6459.34 6316.21,6360.91 6416.6,6376.66 6416.6,6443.59
  region net +12V_PR_A: 5262.79,6360.91 5263.01,6459.34 5233.66,6488.59 5209.89,6417.7
  region net +12V_PR_A: 5262.79,6360.91 5282.69,6459.34 5243.66,6488.59 5212.04,6425.56
  region net +12V_PR_A: 5361.21,6459.34 5361.21,6360.91 5461.6,6376.66 5461.6,6443.59
  region net +12V_PR_B: 4027.79,6459.34 4126.21,6459.34 4110.47,6557.93 4043.54,6557.93
  region net +12V_PR_B: 4126.21,6459.34 4126.21,6360.91 4226.6,6376.66 4226.6,6443.59
  region net +12V_PR_B: 4126.21,6459.34 4126.21,6360.91 4226.6,6376.66 4226.6,6443.59
  region net +12V_PR_C: 3176.21,6459.34 3176.21,6360.91 3276.6,6376.66 3276.6,6443.59
  region net +12V_PR_C: 3077.79,6360.91 3077.79,6459.34 2999.8,6443.59 2999.8,6376.66
  region net +12V_PR_C: 3077.79,6360.91 3077.79,6459.34 3049.8,6443.59 3049.8,6376.66
  region net +12V_PR_C: 3176.21,6459.34 3176.21,6360.91 3276.6,6376.66 3276.6,6443.59

## Silkscreen, mask and mechanical layers (free items; w line width, h text height)
Top Overlay:
  drawing of 259 lines, arcs and shapes, not listed
  text "MARKSIM" at 3135,5701.46 h66.93
  text "AMMDC" at 5795,3720.24 h39.37
Bottom Overlay:
  text "DIGITALMAN" at 6845,4201.46 h66.93

## Text inside footprints (layer, text, board x,y; h text height)
BUZZER1: Top Overlay "+" at 7192.32,4043.1 h50 r225
SW3: Top Overlay "NO" at 2612.05,3824.93 h31.5 r270; Top Overlay "1" at 2473.55,3774.93 h31.5 r90; Top Overlay "2" at 2473.55,3674.93 h31.5 r90; Top Overlay "3" at 2473.55,3574.93 h31.5 r90
U9: Top Overlay "GND" at 6600,6921.74 h26.38; Top Overlay "+12V" at 6385,6921.74 h26.38; Top Overlay "M1" at 6730,6921.74 h26.38; Top Overlay "M2" at 6930,6921.74 h26.38; Top Overlay "GND" at 7200,7046.74 h26.38; Top Overlay "GND" at 7285,7046.74 h26.38; Top Overlay "VCC" at 7095,7046.74 h26.38; Top Overlay "PWM1" at 7080,6801.74 h26.38; Top Overlay "PWM2" at 7190,6801.74 h26.38; Top Overlay "EN" at 7315,6801.74 h26.38; Top Overlay "MOTOR" at 6820,6801.74 h26.38; Top Overlay "POWER" at 6515,6801.74 h26.38
U10: Top Overlay "GND" at 5445,6929.24 h26.38; Top Overlay "+12V" at 5230,6929.24 h26.38; Top Overlay "M1" at 5575,6929.24 h26.38; Top Overlay "M2" at 5775,6929.24 h26.38; Top Overlay "GND" at 6045,7054.24 h26.38; Top Overlay "GND" at 6130,7054.24 h26.38; Top Overlay "VCC" at 5940,7054.24 h26.38; Top Overlay "PWM1" at 5925,6809.24 h26.38; Top Overlay "PWM2" at 6035,6809.24 h26.38; Top Overlay "EN" at 6160,6809.24 h26.38; Top Overlay "MOTOR" at 5665,6809.24 h26.38; Top Overlay "POWER" at 5360,6809.24 h26.38
U11: Top Overlay "GND" at 4020,6929.24 h26.38; Top Overlay "+12V" at 3805,6929.24 h26.38; Top Overlay "M1" at 4150,6929.24 h26.38; Top Overlay "M2" at 4350,6929.24 h26.38; Top Overlay "GND" at 4620,7054.24 h26.38; Top Overlay "GND" at 4705,7054.24 h26.38; Top Overlay "VCC" at 4515,7054.24 h26.38; Top Overlay "PWM1" at 4500,6809.24 h26.38; Top Overlay "PWM2" at 4610,6809.24 h26.38; Top Overlay "EN" at 4735,6809.24 h26.38; Top Overlay "MOTOR" at 4240,6809.24 h26.38; Top Overlay "POWER" at 3935,6809.24 h26.38
U12: Top Overlay "GND" at 2840,6926.74 h26.38; Top Overlay "+12V" at 2625,6926.74 h26.38; Top Overlay "M1" at 2970,6926.74 h26.38; Top Overlay "M2" at 3170,6926.74 h26.38; Top Overlay "GND" at 3440,7051.74 h26.38; Top Overlay "GND" at 3525,7051.74 h26.38; Top Overlay "VCC" at 3335,7051.74 h26.38; Top Overlay "PWM1" at 3320,6806.74 h26.38; Top Overlay "PWM2" at 3430,6806.74 h26.38; Top Overlay "EN" at 3555,6806.74 h26.38; Top Overlay "MOTOR" at 3060,6806.74 h26.38; Top Overlay "POWER" at 2755,6806.74 h26.38